# Altium PCB PCB1.PcbDoc
Units mil, origin at the board's own origin, x right, y up, seen from the top; angles counter-clockwise.
Board outline 1855 x 1305 mil, 2 copper layers (Top Layer, Bottom Layer); 10 components, 8 nets, 28 pads, 2 vias.
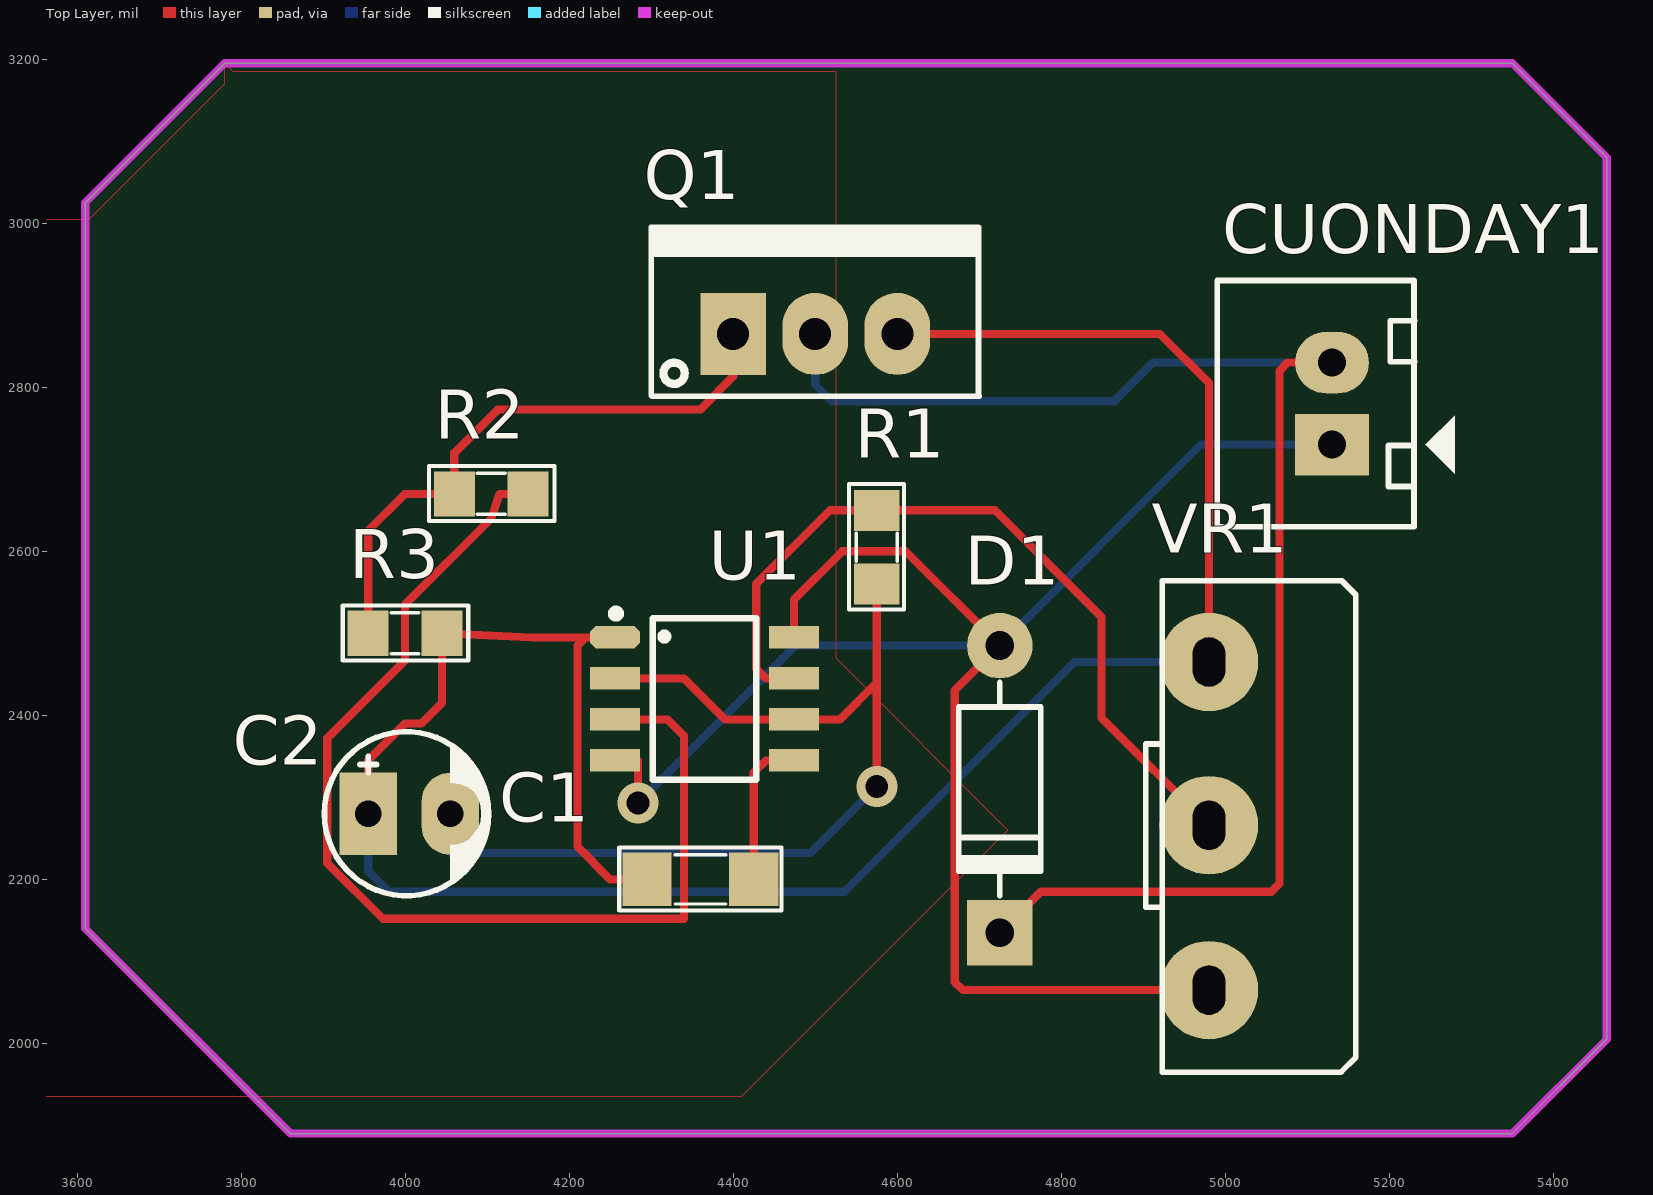
[diagram p0: Top Layer view]
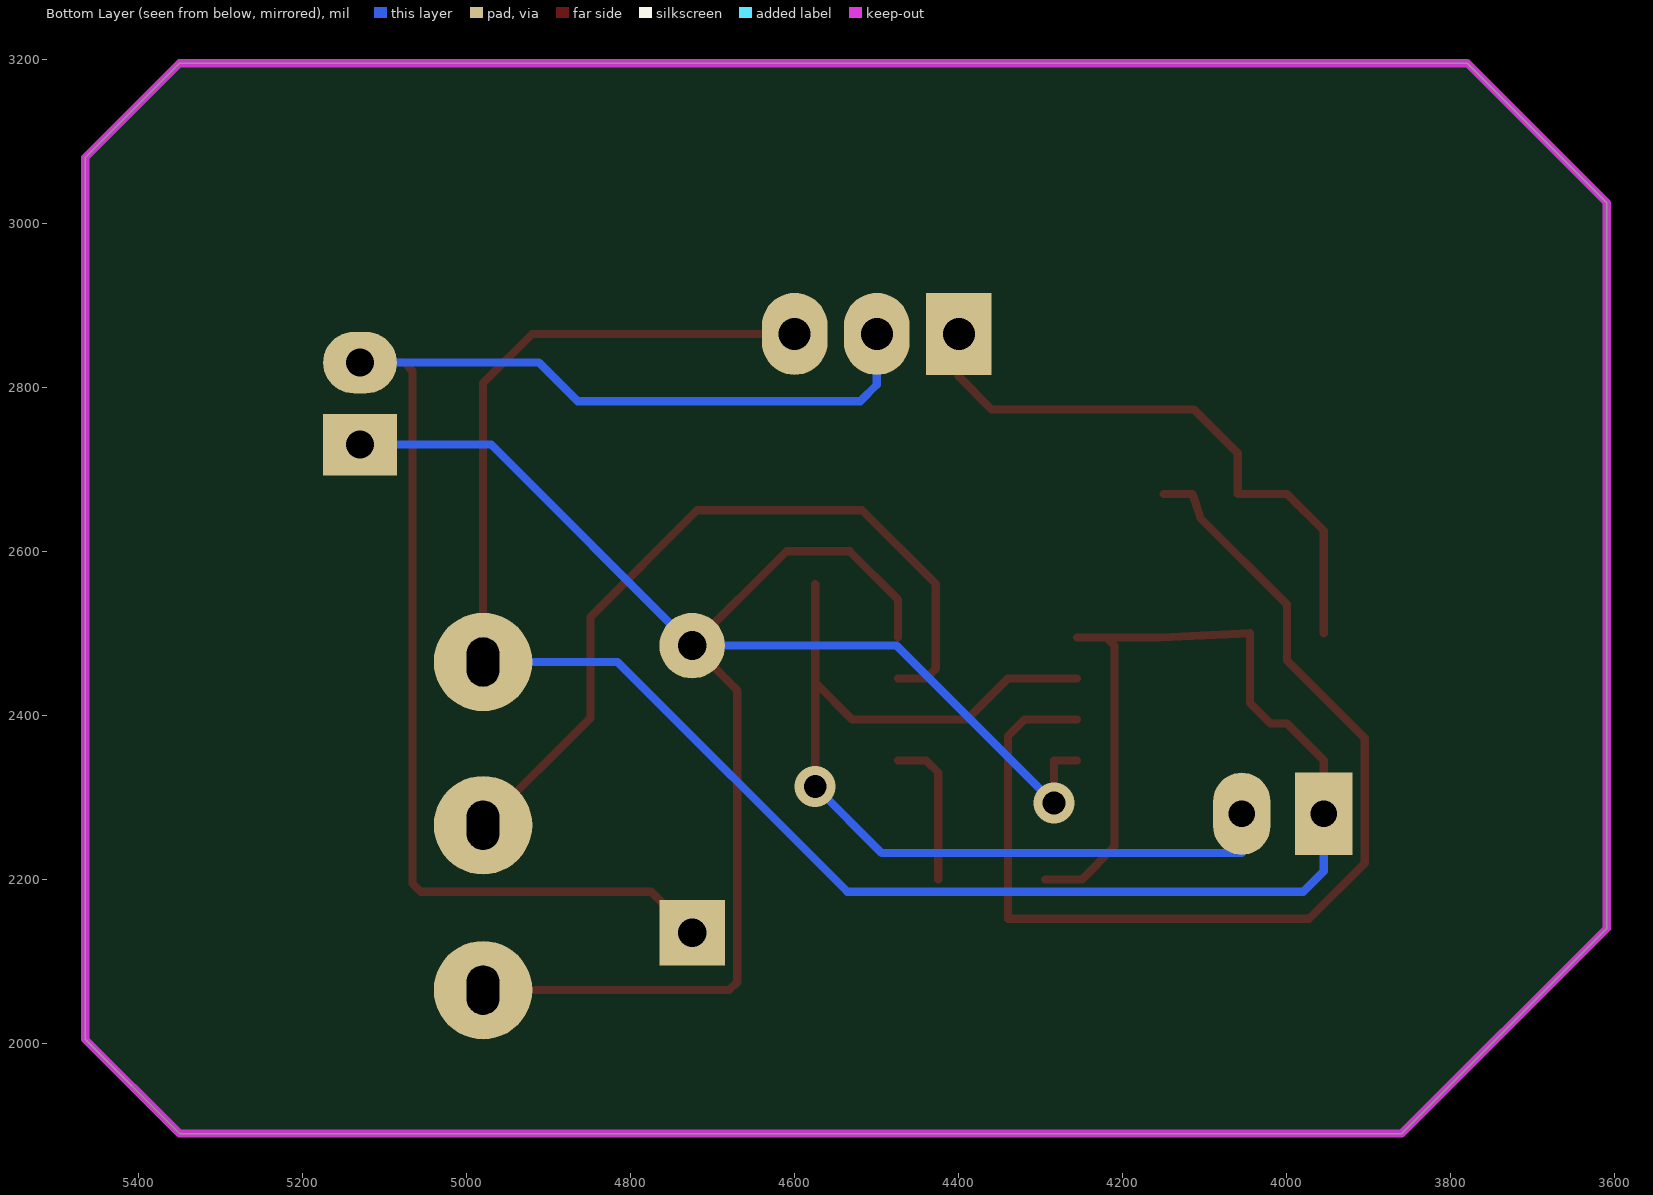
[diagram p1: Bottom Layer view, seen from below]
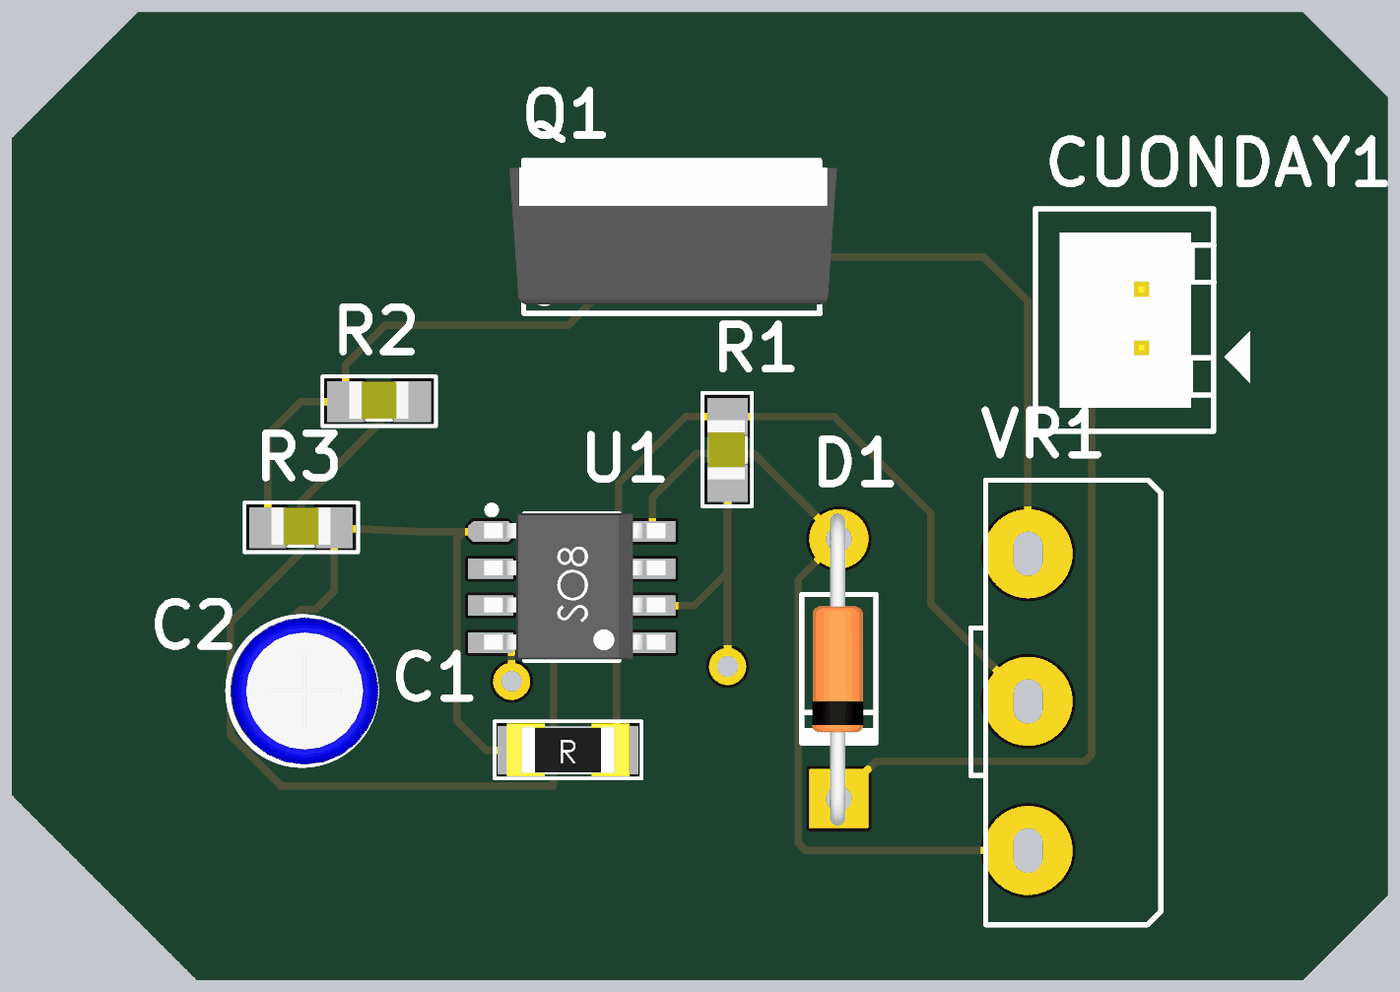
[diagram p2: 3D render of the assembled board from above, using the file's embedded part models]

## Layer stack, top to bottom
Top Solder: solder mask 0.4, Solder Resist, Dk 3.5
Top Layer: signal copper 1.4
Dielectric 1: dielectric 12.6, FR-4, Dk 4.8
Bottom Layer: signal copper 1.4
Bottom Solder: solder mask 0.4, Solder Resist, Dk 3.5

## Board outline
3610,2140 3610,3025 3780,3195 5350,3195 5465,3080 5465,2005 5350,1890 3860,1890

## Design rules (kind name [scope] priority, off if disabled: settings)
Clearance [All] p1: gap=10
PolygonConnect [All] p1: connectstyle=Relief reliefconductorwidth=10 reliefentries=4 polygonreliefangle="90 Angle" airgapwidth=10
RoutingVias [All] p1: holewidth=28 width=50 viastyle="Through Hole" minholewidth=28 minwidth=50 maxholewidth=28 maxwidth=50
SolderMaskExpansion [All] p1: expansion=4
UnpouredPolygon [All] p1: allowunpoured=FALSE
Width [All] p1: maxlimit=10 minlimit=10 preferedwidth=10
29 further rules are at their usual default settings.

## Components (designator, comment, footprint, x,y, rotation, side; value= is the part's Value field where it differs from the comment)
C1 "104" SM-1206 4360,2200 r0 top
C2 "4.5uF-50V" CP1/2 3955,2280 r0 top
CUONDAY1 "JP2" CON2 5130,2730 r90 top
D1 "1N4007" D1A 4725,2485 r90 top
Q1 "IRF840" QTO-220 4400,2865 r0 top
R1 "100K" SM-0805 4575,2605 r270 top
R2 "150" SM-0805 4105,2670 r180 top
R3 "10K" SM-0805 4000,2500 r180 top
U1 "NE555" NE555-SMD 4365,2420 r0 top
VR1 "50K" VOL-S 4980,2265 r270 top

## Footprints (in the part's own frame and the unit in brackets; to place one, negate y for a bottom-side part, rotate by r counter-clockwise, add the part's x,y. Pads: shape width x height; smd on the part's side, far side on the other; paste and mask are expansions set on the pad)
CON2 [mil] "CON2"
  rect 75x90 hole 34: 1(0,0)
  oval 75x90 hole 34: 2(100,0)
  silkscreen extent -100,-150 200,140, body extent -68,-70 168,107, height 236
CP1/2 [mil] "Tu hoa < 22uF/16>50V"
  rect 70x100 hole 32: 1(0,0)
  oval 70x100 hole 32: 2(100,0)
  silkscreen extent -53,-100 147,100, body extent -49,-99 149,99, height 287
D1A [mil] "Diode 1A, W 100mil, L 350mil"
  round 80 hole 35: 1(0,0)
  rect 80x80 hole 35: 2(-350,0)
  silkscreen extent -305,-50 -45,50, body extent -386,-33 34,36, height 84
NE555-SMD [mm] "SOIC, 8-Leads, Body 5.00x4.00mm, Pitch 1.27mm, IPC Medium Density"
  oct 1.55x0.7 smd: 1(-2.775,1.905)
  rect 1.55x0.7 smd: 2(-2.775,0.635) 3(-2.775,-0.635) 4(-2.775,-1.905) 5(2.775,-1.905) 6(2.775,-0.635) 7(2.775,0.635) 8(2.775,1.905)
  silkscreen extent -2.87,-2.5 1.6,2.77, body extent -3,-2.47 3.2,2.53, height 1.66
QTO-220 [mil] "TO-220 - 1-2-3"
  rect 80x100 hole 39: 1(0,0)
  oval 80x100 hole 39: 2(100,0) 3(200,0)
  silkscreen extent -100,-76 300,130, body extent -119,-64 322,121, height 755
SM-0805 [mil] "Compoment SMD 80x50mil"
  rect 50x55 smd: 1(-45,0) 2(45,0)
  silkscreen extent -77,-34 76,33, body extent -40,-27 40,23, height 24
SM-1206 [mil] "Compoment SMD 120x60mil"
  rect 60x65 smd: 1(-65,0) 2(65,0)
  silkscreen extent -99,-38 99,39, body extent -83,-35 83,36, height 25
VOL-S [mil] "Volume control single"
  round 120 hole 40 slot 60 at 0 deg: 1(-200,0) 2(-1,0) 3(200,0)
  silkscreen extent -299,-77 300,179

## Part data
C1 C2: library part CM, "Cap SMD"
CUONDAY1: library part Con2, "Connector 2"
D1: library part D1A, "Diode 1A"
Q1: "MOSFET N - CHANNEL 500V - 0.75 - 8A - TO-220"
R1 R2 R3: library part R, "Resistor 1/4W"
VR1: library part VOL-S, "Var Resistor"

## Via types
v1: diameter 50, hole 28, Top Layer to Bottom Layer, 2 vias

## Nets (pads, with @x,y where several pads share a name; then routed paths per layer and width w, separated by ;. In a path a pad name is that pad's centre, name@x,y a point inside that pad or via, vN(x,y) a via of type N, cw(c..) or ccw(c..) an arc to the next point about the centre after c; other vN are vias at no path point)
GND: C1.1 C2.1 Q1.3 R3.1 U1.1 VR1.1 | length 2806.8
  Top Layer w10: C2.1 3955,2345 4000,2390 4020,2390 4045,2415 R3.1 4155,2495 4220,2495 ; U1.1 4220,2495 ; C1.1 4250,2200 4210,2240 4210,2485 4220,2495 ; Q1.3 4920,2865 4980,2805 VR1.1
  Bottom Layer w10: C2.1 3955,2210 3980,2185 4536,2185 4816,2465 VR1.1
NetC1_2: C1.2 U1.5 | length 185.5
  Top Layer w10: C1.2 4425,2330 4440,2345 U1.5
NetC2_2: C2.2 R1.2 U1.2 U1.6 | length 1207.2
  Top Layer w10: U1.2 4340,2445 4390,2395 U1.6 4530,2395 4575,2440 ; v1(4575,2313) 4575,2440 ; R1.2 4575,2440
  Bottom Layer w10: C2.2 4055,2232 4494,2232 v1(4575,2313)
NetCUONDAY1_2: CUONDAY1.2 D1.2 Q1.2 | length 1778.7
  Top Layer w10: D1.2 4775,2185 5056,2185 5066,2195 5066,2820 5076,2830 CUONDAY1.2
  Bottom Layer w10: Q1.2 4500,2803 4520,2783 4865,2783 4912,2830 CUONDAY1.2
NetQ1_1: Q1.1 R2.2 R3.2 | length 729.2
  Top Layer w10: R3.2 3955,2625 4000,2670 R2.2 4060,2720 4113,2773 4360,2773 4400,2813 Q1.1
NetR1_1: R1.1 U1.7 VR1.2 | length 974.6
  Top Layer w10: U1.7 4440,2445 4428,2457 4428,2560 4518,2650 R1.1 4719,2650 4849,2520 4849,2397 VR1.2
OUT: R2.1 U1.3 | length 1348.2
  Top Layer w10: R2.1 4115,2670 4105,2640 4000,2535 4000,2467 3905,2372 3905,2220 3973,2152 4340,2152 4340,2375 4320,2395 U1.3
VCC: CUONDAY1.1 D1.1 U1.4 U1.8 VR1.3 | length 2223.5
  Top Layer w10: U1.4 4284,2345 v1(4284,2293) ; U1.8 4474,2495 4474,2541 4533,2600 4610,2600 D1.1 4670,2430 4670,2075 4680,2065 VR1.3
  Bottom Layer w10: v1(4284,2293) 4476,2485 D1.1 4970,2730 CUONDAY1.1

## Polygon pours and split planes (outlines as drawn)
no net on Keep-Out Layer " " (none, shelved): 3610,2140 3860,1890 5350,1890 5465,2005 5465,3080 5350,3195 3780,3195 3610,3025
GND on Top Layer "Keep-Out Layer-No Net 1" (solid, remove dead copper, shelved): 3610,2140 3860,1890 5350,1890 5465,2005 5465,3080 5350,3195 3780,3195 3610,3025
GND on Top Layer "Keep-Out Layer-No Net" (solid, shelved): 3610,2140 3860,1890 5350,1890 5465,2005 5465,3080 5350,3195 3780,3195 3610,3025
GND on Top Layer "Top Layer-No Net" (solid, shelved, pour order 7): 3780,3195 3790,3185 4525,3185 4525,2470 4735,2260 4410,1935 3905,1935 3490,1935 3455,1970 3320,2105 3320,2440 3320,2800 3315,2805 3510,3000 3510,3005 3615,3005 3750,3140 3780,3170 3780,3195

## Keep-outs
Keep-Out Layer:
  the board outline again, w10